# EAGLE board Leiterplatte v13 (EAGLE 9.7.0)
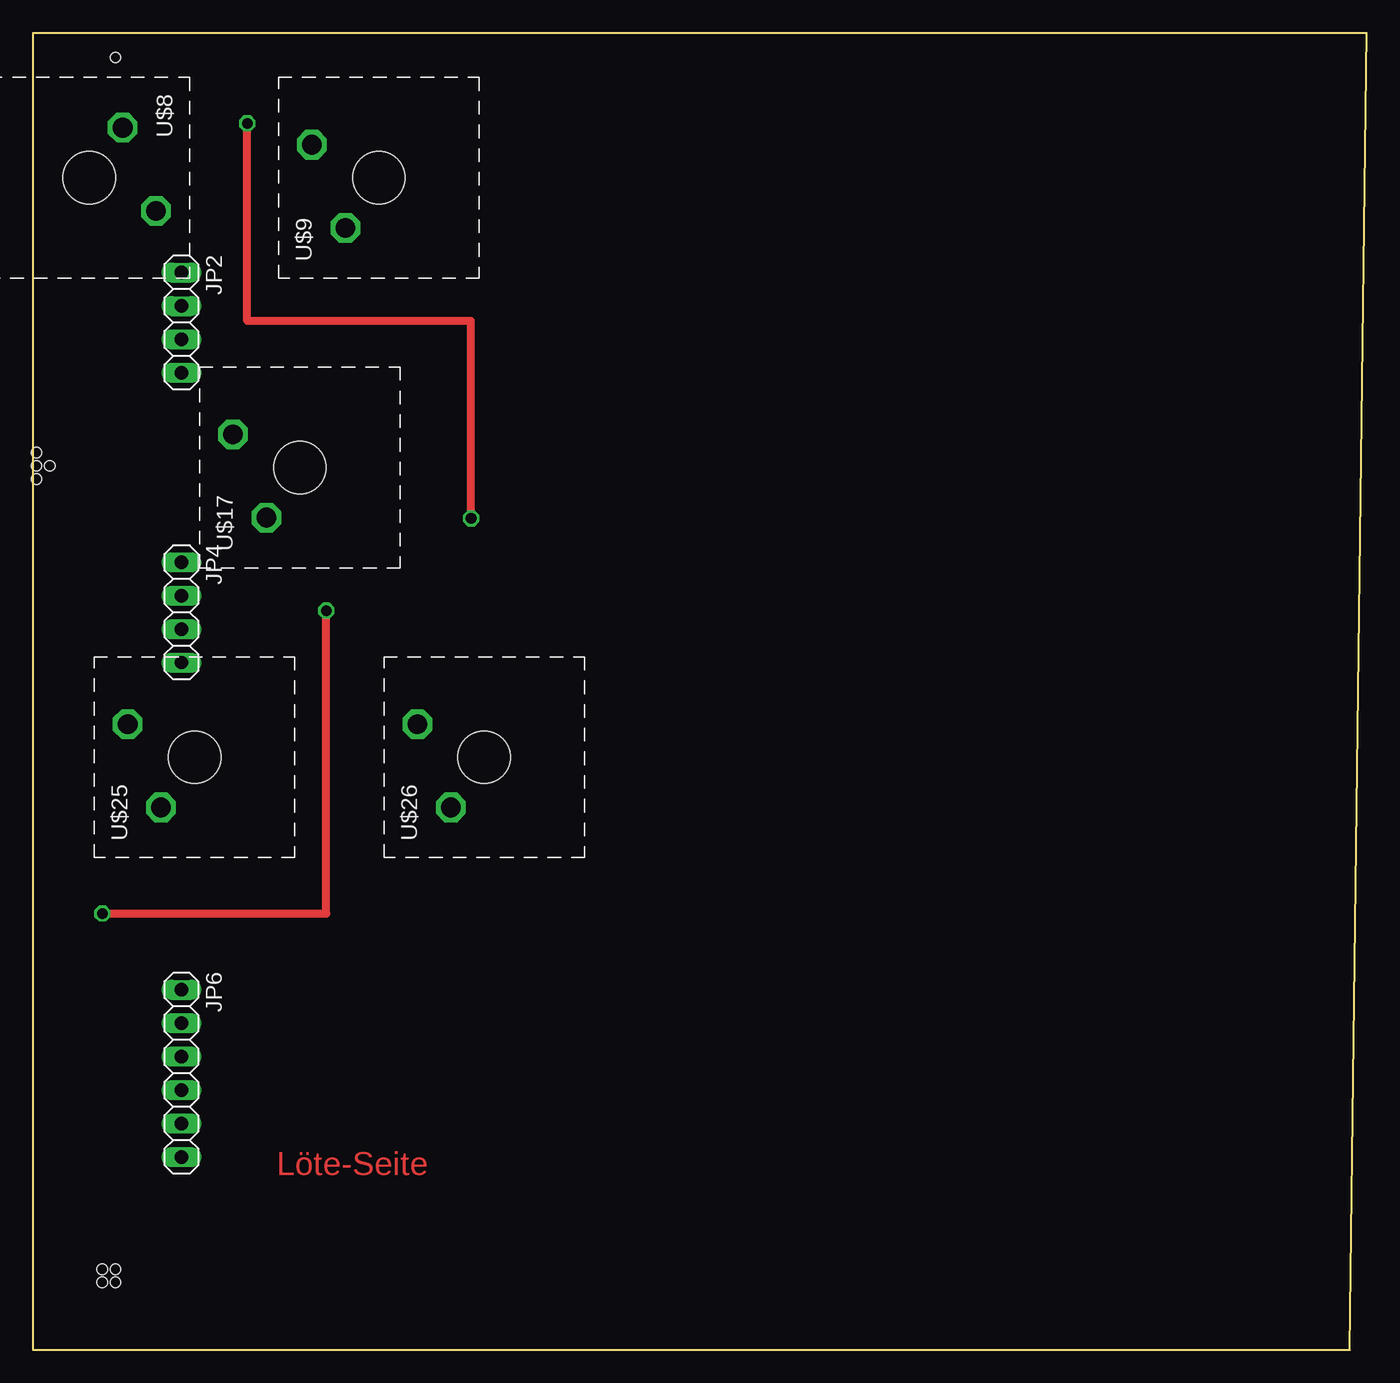
[diagram p0: board, top side]
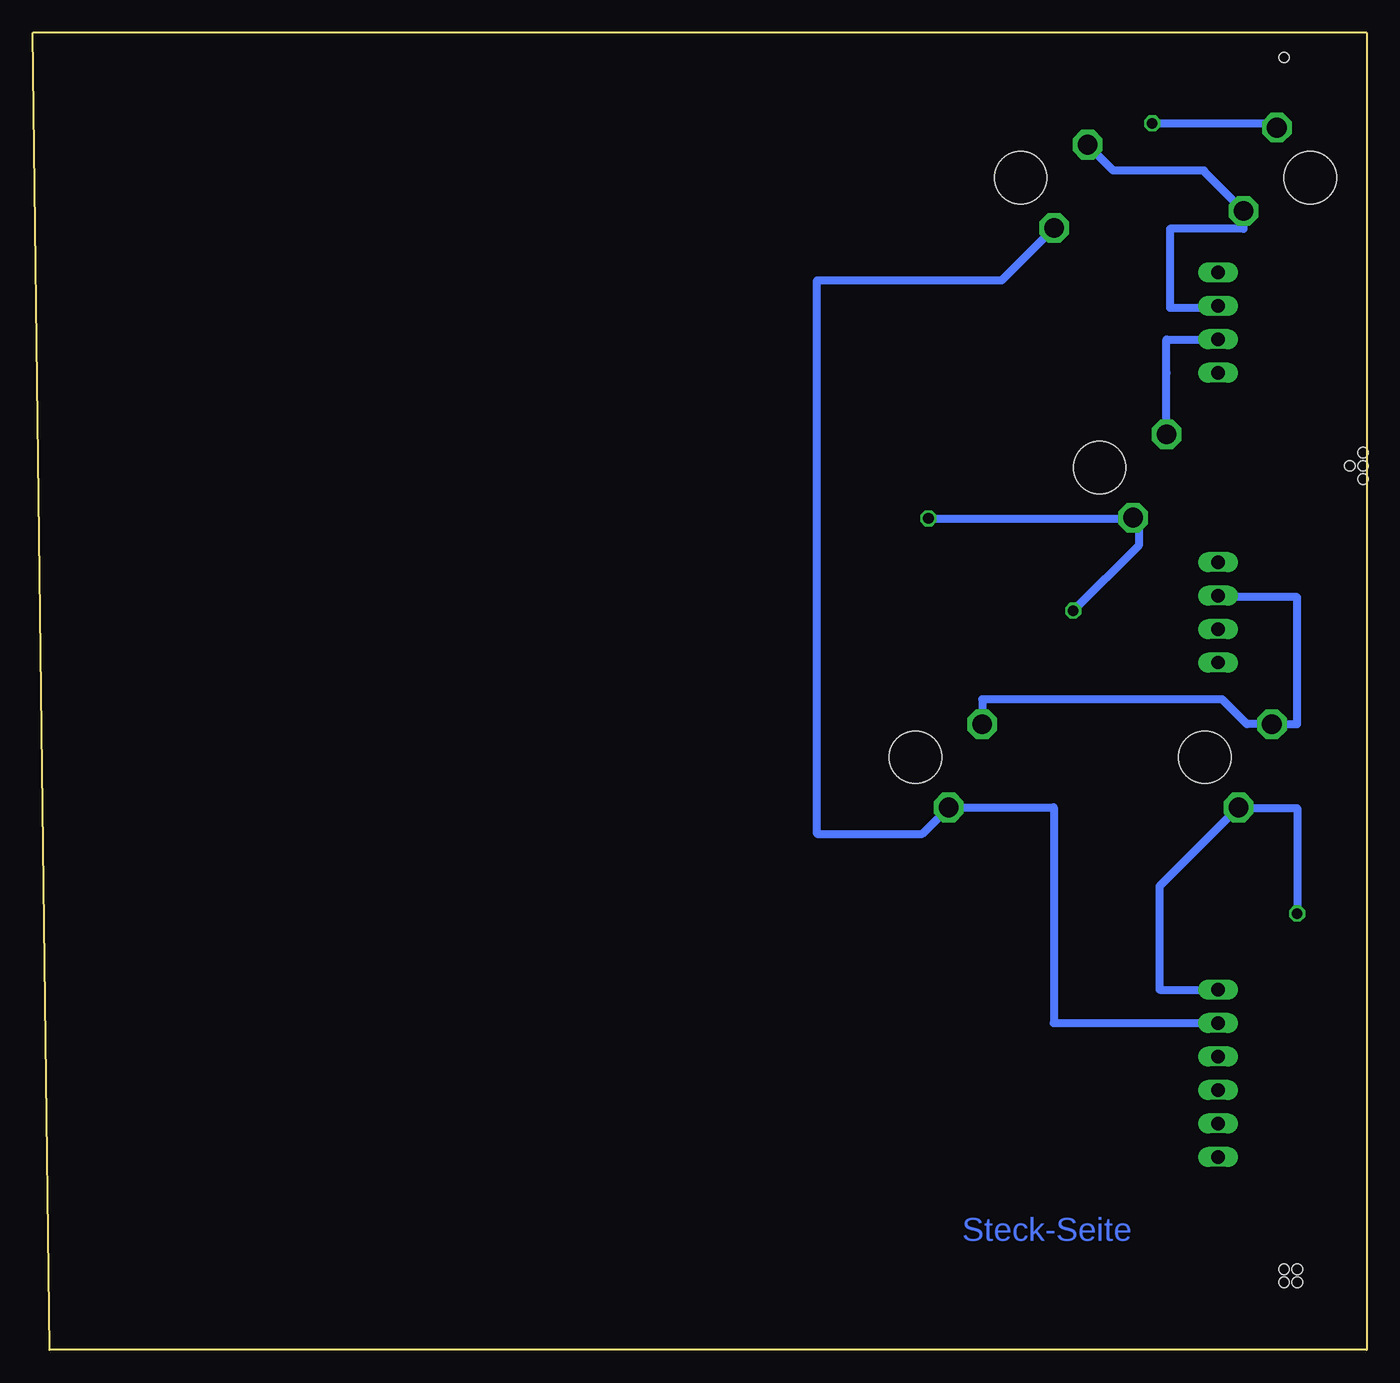
[diagram p1: board, bottom side, seen from below]

Size 101.27 x 100 mm. Coordinates in mm from the lower left corner, seen from the top.
Outline: 0,100 0,0 100,0 101.27,100 0,100
Copper layers (1*16): Top 0.035mm / dielectric 1.5mm / Bottom 0.035mm
Design rules "Fusion Electronics Design Rules": minimum track width 6mil, minimum drill 0.35mm, track to track 6mil, track to pad 6mil, pad to pad 6mil, via to via 6mil, smd to smd 6mil, copper to edge 40mil, drill to drill 6mil, minimum pad ring 10mil, minimum via ring 8mil, stop-mask expansion 4mil, vias tented up to drill 9999mil, thermal gap 10mil
Holes 0.8 mm at 0.27,68.13 0.27,66.13 1.27,67.13 6.27,98.13 6.27,6.13 5.27,6.13 5.27,5.13 6.27,5.13 0.27,67.13

## Footprints (pad centres in the part's own frame; a part is rotated, then mirrored left to right if it is on the bottom)
1X04 = drill 1.016 long: 1 -3.81,0; 2 -1.27,0; 3 1.27,0; 4 3.81,0
1X06 = drill 1.016 long: 1 -6.35,0; 2 -3.81,0; 3 -1.27,0; 4 1.27,0; 5 3.81,0; 6 6.35,0
CHERRY_MX1A-11NN_SWITCH = drill 1.5 octagon: P$1 2.51,5.08; P$2 -3.81,2.54 | hole 3.988: 0,0

## Placement (x,y rotation side)
JP2  PINHD-1X4  [1X04]  11.27,78 270 top
JP4  PINHD-1X4  [1X04]  11.27,56 270 top
JP6  PINHD-1X6  [1X06]  11.27,21 270 top
U$8  GEILER_TASTER  [CHERRY_MX1A-11NN_SWITCH]  4.27,89 270 top
U$9  GEILER_TASTER  [CHERRY_MX1A-11NN_SWITCH]  26.27,89 90 top
U$17  GEILER_TASTER  [CHERRY_MX1A-11NN_SWITCH]  20.27,67 90 top
U$25  GEILER_TASTER  [CHERRY_MX1A-11NN_SWITCH]  12.27,45 90 top
U$26  GEILER_TASTER  [CHERRY_MX1A-11NN_SWITCH]  34.27,45 90 top

## Library data of the parts
JP2 JP4 = Connector; CATEGORY: Headers; DESCRIPTION: Header-Straight-4 Position; PACKAGE_TYPE: THT; PITCH: 0.100" (2.54mm); SUBCATEGORY: Headers-Male Pins; TYPE: Board to Board or Cable-Unshrouded-Through Hole-Straight
JP6 = Connector; CATEGORY: Headers; DESCRIPTION: Header-Straight-6 Position; PACKAGE_TYPE: THT; PITCH: 0.100" (2.54mm); SUBCATEGORY: Headers-Male Pins; TYPE: Board to Board or Cable-Unshrouded-Through Hole-Straight
U$8 U$9 U$17 U$25 U$26 = Hammer_Taster; AVAILABILITY: In Stock; CHECK_PRICES: https://www.snapeda.com/parts/MX1A-11NN/Cherry/view-part/?ref=eda; DESCRIPTION: Switch,Key,SPST-NO,Keyboard,Low Profile,10mA,12VDC,Face Place Mount,Std Force | Cherry Americas MX1A-11NN; MF: Cherry; MP: MX1A-11NN; PACKAGE: None; PRICE: None; SNAPEDA_LINK: https://www.snapeda.com/parts/MX1A-11NN/Cherry/view-part/?ref=snap

## Nets
N$7: U$25.P$1 U$26.P$1
N$11: U$8.P$1 U$9.P$1
N$12: U$17.P$1
N$13: JP6.1 U$25.P$2
N$14: JP6.2 U$9.P$2 U$26.P$2

## Tracks (layer width: path | path; a pad name or v marks a point on that pad's centre or on a via)
N$7
  Bottom 0.61: U$26.P$1 29.19,49.39 10.97,49.39 9.09,47.51 U$25.P$1 5.27,47.51 5.27,57.15 11.45,57.15 11.45,57.13 11.27,57.13
N$11
  Bottom 0.607: 12.35,89.57 19.25,89.57 U$9.P$1
  Bottom 0.61: 12.35,89.57 12.35,89.49 U$8.P$1 9.35,85.13 14.93,85.13 14.93,82.13 14.93,81.81 14.93,79.13 11.27,79.13
N$12
  Bottom 0.61: U$17.P$1 15.19,74.19 15.19,76.71 11.19,76.71
N$13  (via drill 0.8)
  Top 0.61: v5.27,33.13 22.27,33.13 v22.27,56.13 | v33.27,63.13 33.27,78.13 16.27,78.13 v16.27,93.13
  Bottom 0.61: U$25.P$2 15.7,35.22 15.7,27.35 JP6.1 | U$25.P$2 9.58,41.04 | U$25.P$2 9.73,41.13 5.27,41.13 v5.27,33.13 | v22.27,56.13 17.27,61.13 17.27,63.13 v33.27,63.13 | v16.27,93.13 6.27,93.13
N$14
  Bottom 0.61: U$9.P$2 27.7,81.22 41.72,81.22 41.72,39.19 33.73,39.19 U$26.P$2 23.75,41.19 23.75,24.81 JP6.2

## Text on the board
Top: Löte-Seite
Bottom: Steck-Seite